# Altium PCB STM32_PCB.PcbDoc
Units mm, origin at the board's own origin, x right, y up, seen from the top; angles counter-clockwise.
Board outline 36.25 x 35.25 mm, 4 copper layers (Top Layer, Int1 (GND), Int2 (PWR), Bottom Layer), stack 1.518 mm thick; 35 components, 27 nets, 166 pads, 38 vias.
Unrouted connection lines stored in the file: 21.
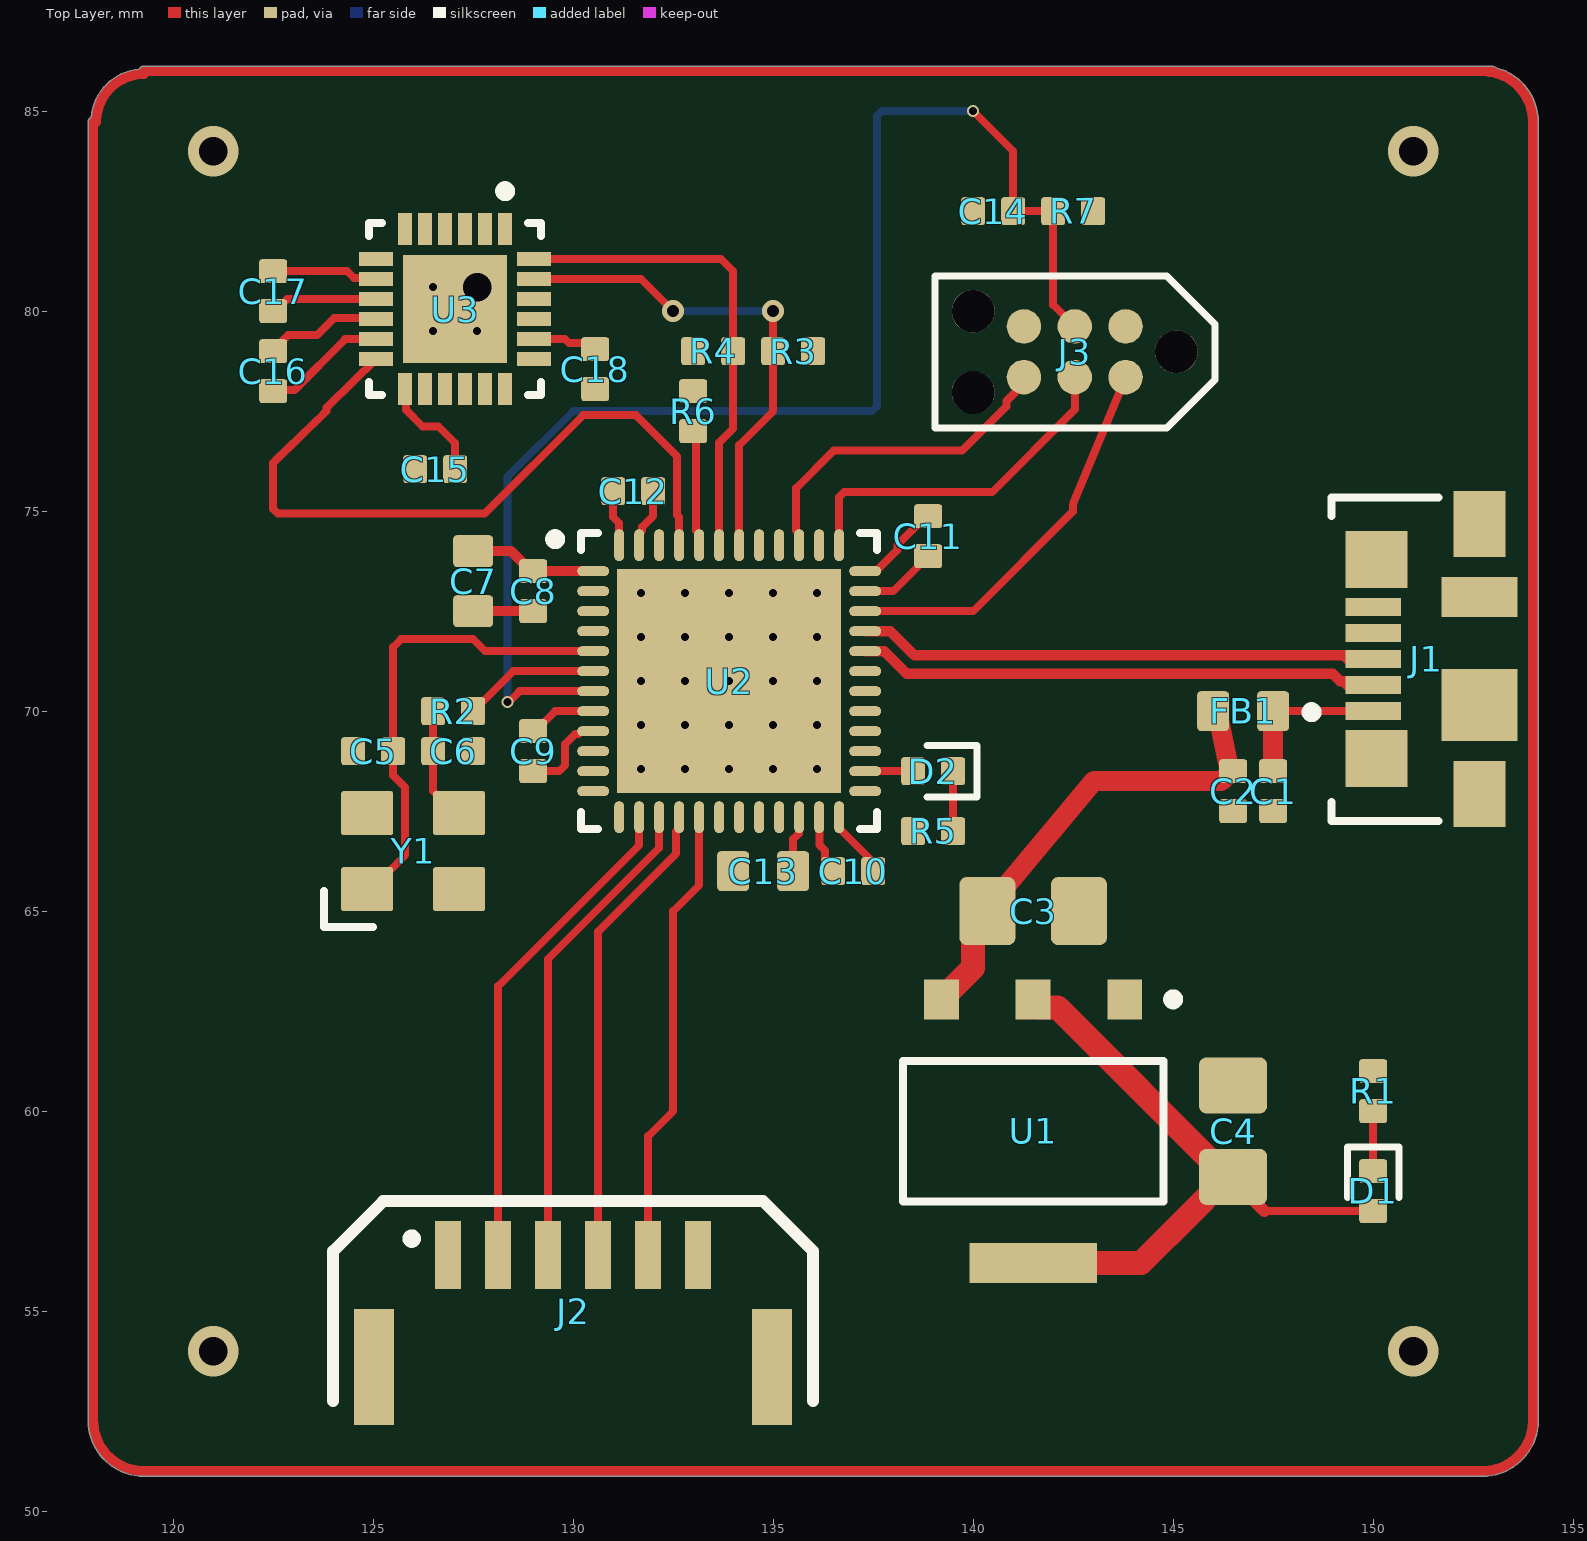
[diagram p0: Top Layer view]
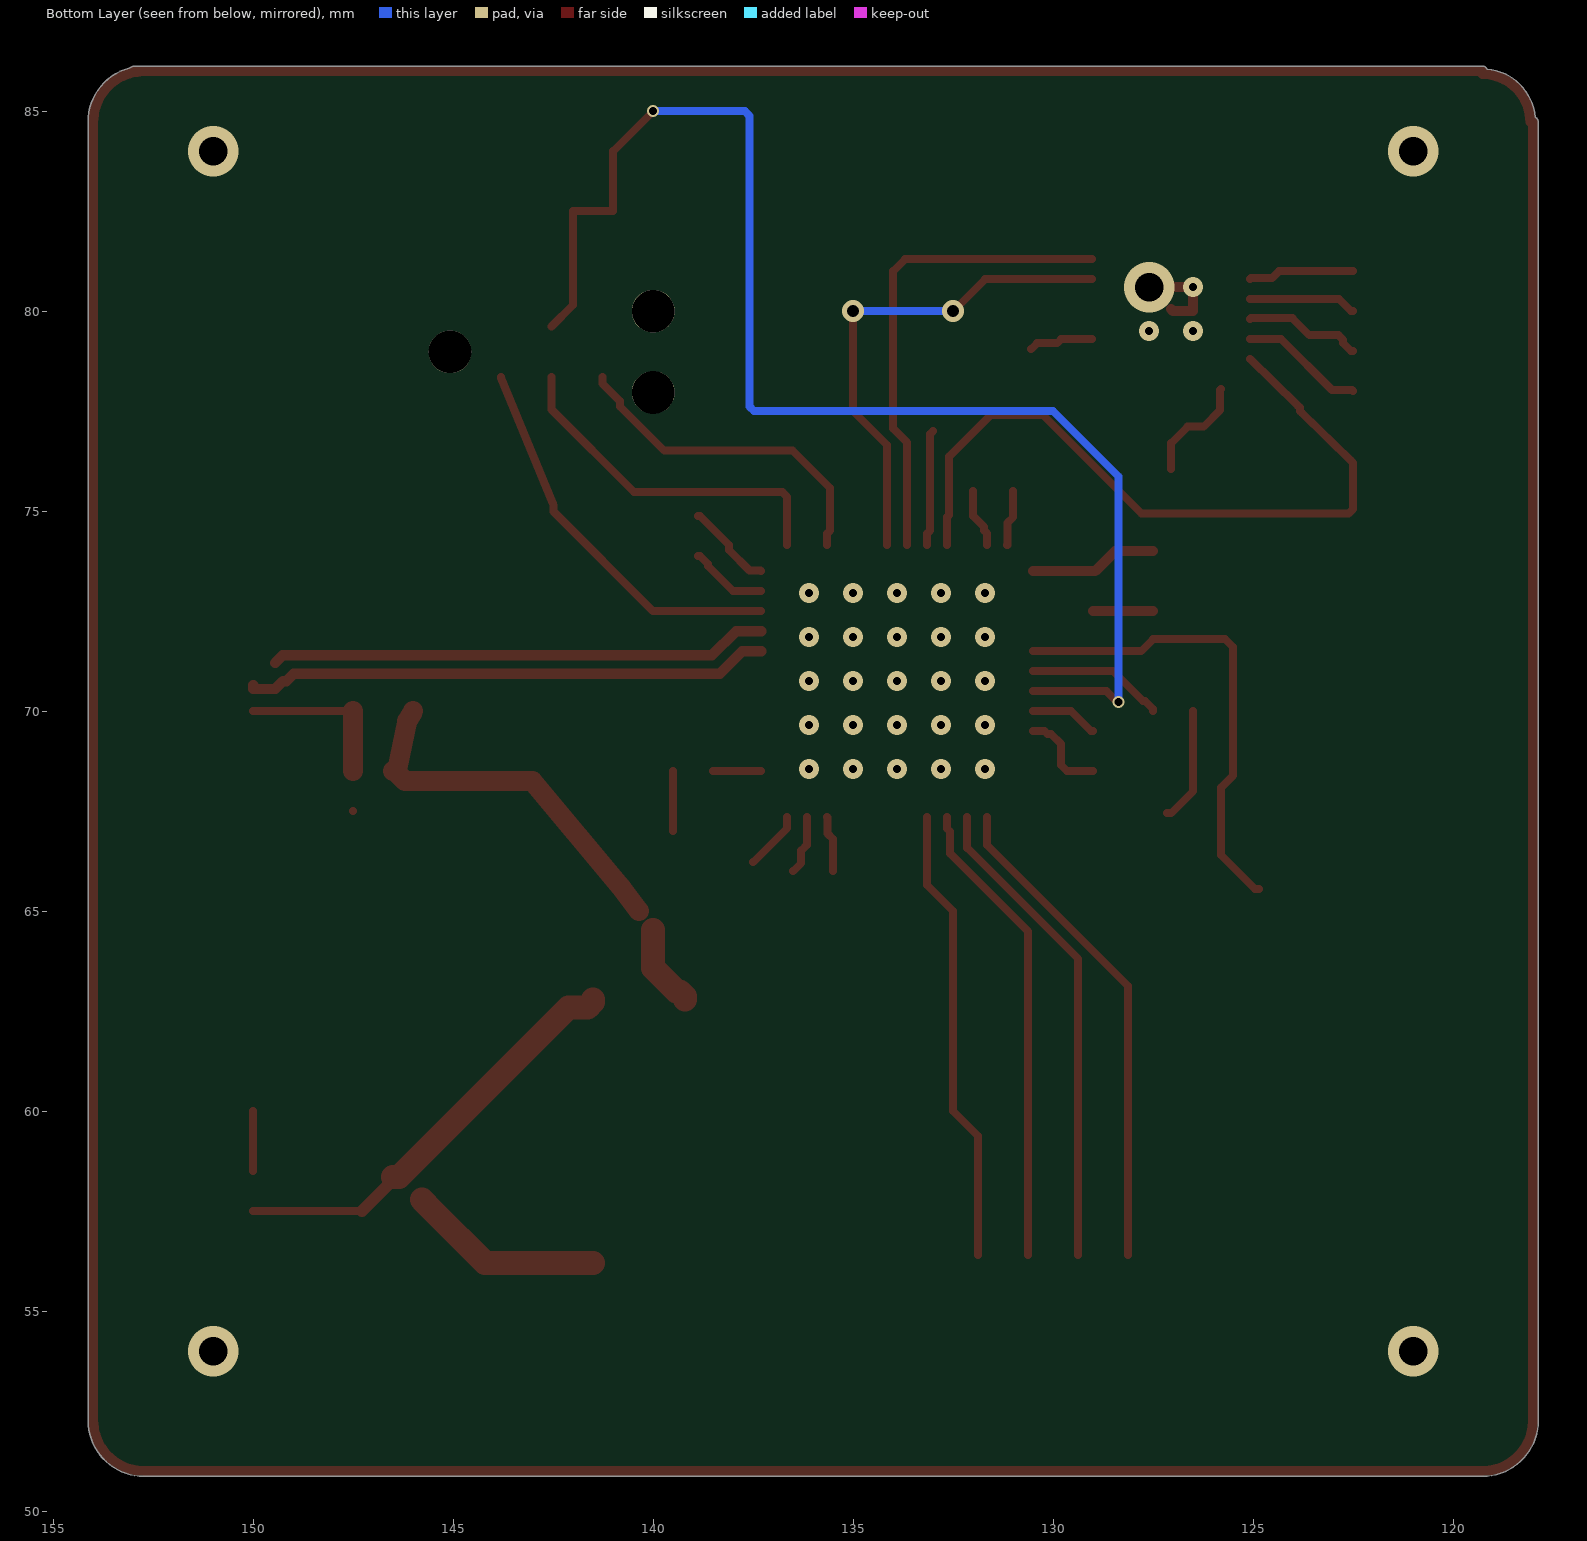
[diagram p1: Bottom Layer view, seen from below]
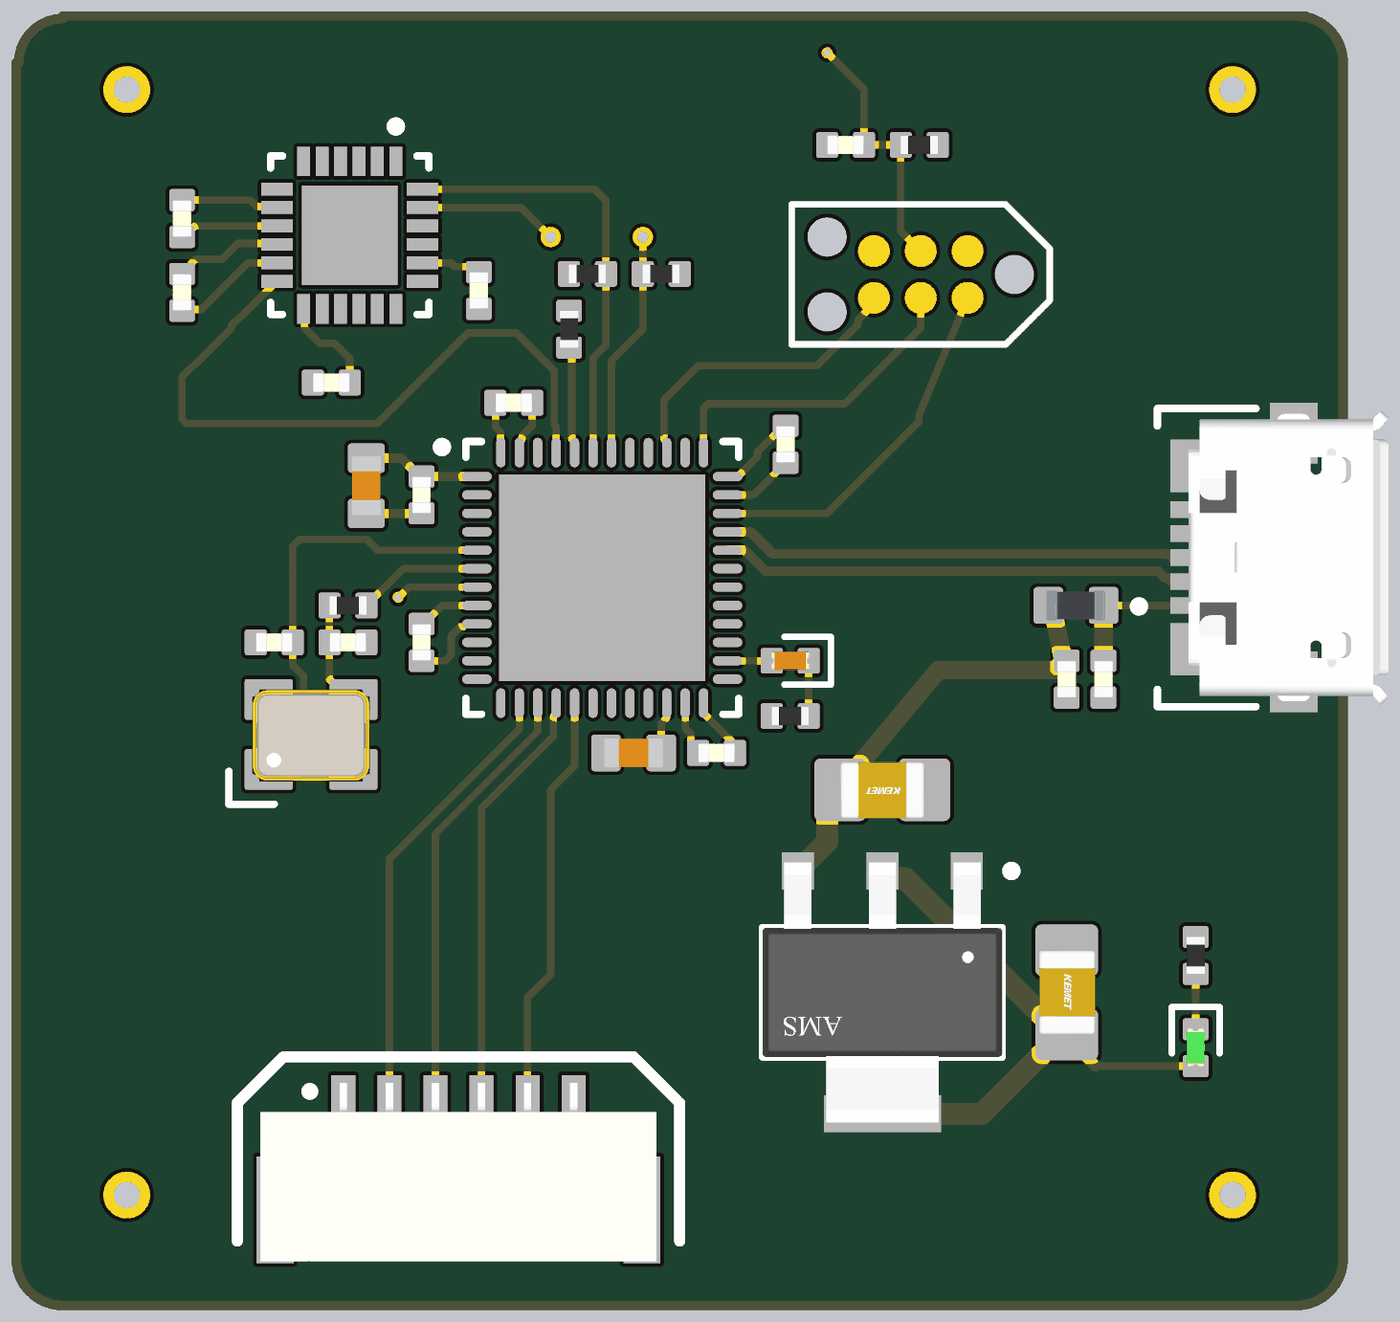
[diagram p2: 3D render of the assembled board from above, using the file's embedded part models]

## Layer stack, top to bottom
Top Solder: solder mask 0.0254, SM-001, Dk 4
Top Layer: signal copper 0.009
Dielectric 1: prepreg 0.2, PP-017, Dk 4.6
Int1 (GND): signal copper 0.0175
Dielectric 3: core 1.065, Core-039, Dk 4.6
Int2 (PWR): signal copper 0.0175
Dielectric 5: prepreg 0.2, PP-017, Dk 4.6
Bottom Layer: signal copper 0.009
Bottom Solder: solder mask 0.0254, SM-001, Dk 4

## Board outline
117.873,52.27 117.873,84.73 cw(c118,84.73) 117.948,84.846 cw(c119.27,84.73) 119.154,86.052 cw(c119.27,86) 119.27,86.127 153,86.127 153.101,86.077 cw(c152.73,84.73) 154.127,84.73 154.127,52.27 cw(c152.73,52.27) 152.73,50.873 119.27,50.873 cw(c119.27,52.27)

## Design rules (kind name [scope] priority, off if disabled: settings)
Clearance [All] p1: gap=0.2 ignorepadtopadclearanceinfootprint=FALSE
DiffPairsRouting [All] p1: maxlimit=0.203 minlimit=0.203 mostfreqgap=0.203 toplayer_minwidth=0.26 toplayer_maxwidth=0.26 toplayer_prefwidth=0.26 midlayer1_minwidth=0.26 midlayer1_maxwidth=0.26 midlayer1_prefwidth=0.26 midlayer2_minwidth=0.26 midlayer2_maxwidth=0.26 midlayer2_prefwidth=0.26 bottomlayer_minwidth=0.26 bottomlayer_maxwidth=0.26 bottomlayer_prefwidth=0.26 maxuncoupledlength=12.7
PolygonConnect [All] p1: connectstyle=Direct reliefconductorwidth=0.254 reliefentries=4 polygonreliefangle="90 Angle" airgapwidth=0.254
RoutingVias [All] p1: holewidth=0.3 width=0.7 viastyle="Through Hole" minholewidth=0.25 minwidth=0.55 maxholewidth=0.4 maxwidth=0.9
SolderMaskExpansion [All] p1: expansion=0.102 istentingtop=FALSE
SupplyNets "Schematic Supply Nets_4" [InNet('GND')] p1: voltage=0.000
SupplyNets "Schematic Supply Nets_3" [InNet('3V3')] p2: voltage=0.000
SupplyNets "Schematic Supply Nets_2" [InNet('VBUS')] p3: voltage=0.000
SupplyNets "Schematic Supply Nets_1" [InNet('+5V')] p4: voltage=0.000
UnRoutedNet [All] p1: checkbadconnections=TRUE
Width [All] p1: maxlimit=1 minlimit=0.2 preferedwidth=0.254 midlayer1_minwidth=0.254 midlayer1_maxwidth=0.254 midlayer2_minwidth=0.254 midlayer2_maxwidth=0.254 minimp=50.000000 maximp=50.000000 favimp=50.000000
28 further rules are at their usual default settings.

## Classes and differential pairs
differential pair class *DIFF_USB: USB_D
differential pair USB_D: +USB_D_P -USB_D_N

## Components (designator, comment, footprint, x,y, rotation, side; value= is the part's Value field where it differs from the comment)
C1 "2u2" CAP_0402 147.5,68 r270 top
C2 "2u2" CAP_0402 146.5,68 r270 top
C3 "22u" CAP_0805 141.5,65 r180 top
C4 "22u" CAP_0805 146.5,59.5 r270 top
C5 "C0402" CAP_0402 125,69 r180 top
C6 "C0402" CAP_0402 127,69 r0 top
C7 "2.2u" CAP_0603 127.5,73.25 r270 top
C8 "100n" CAP_0402 129,73 r270 top
C9 "100n" CAP_0402 129,69 r90 top
C10 "100n" CAP_0402 137,66 r180 top
C11 "100n" CAP_0402 138.875,74.375 r270 top
C12 "100n" CAP_0402 131.5,75.5 r0 top
C13 "2u2" CAP_0603 134.75,66 r180 top
C14 "100n" CAP_0402 140.5,82.5 r180 top
C15 "100n" CAP_0402 126.55,76.05 r180 top
C16 "100n" CAP_0402 122.5,78.5 r270 top
C17 "10n" CAP_0402 122.5,80.5 r270 top
C18 "2n2" CAP_0402 130.55,78.55 r270 top
D1 "GREEN" LED_0402_GREEN 150,58 r90 top
D2 "RED" LED_0402_RED 139,68.5 r0 top
FB1 "120R" FB_0603 146.75,70 r180 top
J1 "473460001" FP-473460001-MFG 152.31,71.3 r90 top
J2 "SM06B-GHS-TB" SM06B-GHS-TB 130,55 r0 top
J3 "TC2030-NL" TC2030-NL-FP 142.54,78.984 r180 top
R1 "1K" RES_0402 150,60.5 r270 top
R2 "0R" RES_0402 127,70 r180 top
R3 "2k2" RES_0402 135.5,79 r0 top
R4 "2k2" RES_0402 133.5,79 r180 top
R5 "1K" RES_0402 139,67 r0 top
R6 "10k" RES_0402 133,77.5 r90 top
R7 "10k" RES_0402 142.5,82.5 r180 top
U1 "AMS1117-3.3" FP-AMS1117-IPC_C 141.5,59.5 r270 top
U2 "STM32F411CEU6" STM-UFQFPN48_L 133.9,70.75 r0 top
U3 "MPU-6050" IS-QFN-24_V 127.05,80.05 r270 top
Y1 "24MHz" XTAL_3225 126,66.5 r0 top

## Footprints (in the part's own frame and the unit in brackets; to place one, negate y for a bottom-side part, rotate by r counter-clockwise, add the part's x,y. Pads: shape width x height; smd on the part's side, far side on the other; paste and mask are expansions set on the pad)
CAP_0402 [mm]
  rrect25% 0.6x0.7 smd: 1(-0.5,0) 2(0.5,0)
  body extent -0.5,-0.26 0.5,0.26, height 0.37
CAP_0603 [mm]
  rrect25% 0.8x1 smd: 1(-0.75,0) 2(0.75,0)
  body extent -0.8,-0.4 0.8,0.4, height 0.51
CAP_0805 [mm]
  rrect25% 1.4x1.7 smd: 1(-1.143,0) 2(1.143,0)
  body extent -1.15,-0.76 1.15,0.79, height 1.01
FB_0603 [mm]
  rrect25% 0.8x1 smd: 1(-0.75,0) 2(0.75,0)
  body extent -0.8,-0.4 0.8,0.4, height 0.81
FP-473460001-MFG [mm]
  rect 0.45x1.38 smd paste+0 mask+0: 1(-1.3,2.31) 2(-0.65,2.31) 3(0,2.31) 4(0.65,2.31) 5(1.3,2.31)
  rect 1.425x1.55 smd paste+0 mask+0: 6(-2.488,2.225) 7(2.487,2.225)
  rect 1.65x1.3 smd paste+0 mask+0: 8(-3.375,-0.35) 11(3.375,-0.35)
  rect 1.8x1.9 smd paste+0 mask+0: 9(-1.15,-0.35)
  rect 1x1.9 smd paste+0 mask+0: 10(1.55,-0.35)
  silkscreen extent -4.04,0.67 4.05,3.97, body extent -4.3,-2.48 4.3,3.45, height 0.25
FP-AMS1117-IPC_C [mm]
  rect 1.004x0.872 smd paste+0 mask+0: 1(-3.295,2.29) 2(-3.295,0) 3(-3.295,-2.29)
  rect 1.004x3.182 smd paste+0 mask+0: 4(3.295,0)
  silkscreen extent -3.42,-3.25 1.75,3.63, body extent -3.9,-3.35 3.9,3.35, height 0.25
IS-QFN-24_V [mm] "QFN, 24-Leads, Body 4x4mm, Pitch 0.5mm, Thermal Pad 2.7x2.6mm"
  rect 0.8x0.35 smd: 1(-2,1.25) 2(-2,0.75) 3(-2,0.25) 4(-2,-0.25) 5(-2,-0.75) 6(-2,-1.25) 13(2,-1.25) 14(2,-0.75) 15(2,-0.25) 16(2,0.25) 17(2,0.75) 18(2,1.25)
  rect 0.35x0.85 smd mask+0.102: 7(-1.25,-1.975) 8(-0.75,-1.975) 9(-0.25,-1.975) 10(0.25,-1.975) 11(0.75,-1.975) 12(1.25,-1.975) 19(1.25,1.975) 20(0.75,1.975) 21(0.25,1.975) 22(-0.25,1.975) 23(-0.75,1.975) 24(-1.25,1.975)
  rect 2.7x2.6 smd: 25(0,0)
  silkscreen extent -3.07,-2.15 2.15,2.15, body extent -2,-2 2,2, height 0.95
LED_0402_GREEN [mm]
  rrect25% 0.6x0.7 smd: A(-0.5,0) K(0.5,0)
  silkscreen extent -0.15,-0.65 1.1,0.65, body extent -0.51,-0.25 0.51,0.25, height 0.45
LED_0402_RED [mm]
  rrect25% 0.6x0.7 smd: A(-0.5,0) K(0.5,0)
  silkscreen extent -0.15,-0.65 1.1,0.65, body extent -0.51,-0.25 0.51,0.25, height 0.45
RES_0402 [mm]
  rrect25% 0.6x0.7 smd: 1(-0.5,0) 2(0.5,0)
  body extent -0.5,-0.25 0.5,0.25, height 0.3
SM06B-GHS-TB [mm]
  rect 0.65x1.7 smd: 1(-3.125,1.4) 2(-1.875,1.4) 3(-0.625,1.4) 4(0.625,1.4) 5(1.875,1.4) 6(3.125,1.4)
  rect 1x2.9 smd: ""(-4.975,-1.4) ""(4.975,-1.4)
  silkscreen extent -6,-2.25 6,2.75, body extent -5.38,-2.8 5.38,2.05, height 4.26
STM-UFQFPN48_L [mm] "QFN, 48-Leads, Body 7.1x7.1mm, Pitch 0.5mm, Thermal Pad 5.6x5.6mm, IPC High Density"
  oval 0.8x0.25 smd: 1(-3.4,2.75) 2(-3.4,2.25) 3(-3.4,1.75) 4(-3.4,1.25) 5(-3.4,0.75) 6(-3.4,0.25) 7(-3.4,-0.25) 8(-3.4,-0.75) 9(-3.4,-1.25) 10(-3.4,-1.75) 11(-3.4,-2.25) 12(-3.4,-2.75) 25(3.4,-2.75) 26(3.4,-2.25) 27(3.4,-1.75) 28(3.4,-1.25) 29(3.4,-0.75) 30(3.4,-0.25) 31(3.4,0.25) 32(3.4,0.75) 33(3.4,1.25) 34(3.4,1.75) 35(3.4,2.25) 36(3.4,2.75)
  oval 0.25x0.8 smd: 13(-2.75,-3.4) 14(-2.25,-3.4) 15(-1.75,-3.4) 16(-1.25,-3.4) 17(-0.75,-3.4) 18(-0.25,-3.4) 19(0.25,-3.4) 20(0.75,-3.4) 21(1.25,-3.4) 22(1.75,-3.4) 23(2.25,-3.4) 24(2.75,-3.4) 37(2.75,3.4) 38(2.25,3.4) 39(1.75,3.4) 40(1.25,3.4) 41(0.75,3.4) 42(0.25,3.4) 43(-0.25,3.4) 44(-0.75,3.4) 45(-1.25,3.4) 46(-1.75,3.4) 47(-2.25,3.4) 48(-2.75,3.4)
  rect 5.6x5.6 smd: 49(0,0)
  silkscreen extent -4.47,-3.7 3.7,3.7, body extent -3.55,-3.55 3.55,3.55, height 0.6
TC2030-NL-FP [mil]
  round 33.98 smd paste-16.99: 1(-50,-25) 2(-50,25) 3(0,-25) 4(0,25) 5(50,-25) 6(50,25)
  round 42.01 hole 42.01 unplated: MH(-100,0) MH(100,-40) MH(100,40)
  silkscreen extent -138,-75 138,75
XTAL_3225 [mm]
  rrect10% 1.3x1.1 smd: 1(-1.15,-0.95) 2(1.15,-0.95) 3(1.15,0.95) 4(-1.15,0.95)
  silkscreen extent -2.23,-1.89 -1,-1, body extent -1.6,-1.28 1.6,1.22, height 0.61

## Part data
C1 C2 C5 C6 C8 C9 C10 C11 C12 C14 C15 C16 C17 C18: library part CAP_0402, "Capacitor SMD 0402"
C3 C4: library part CAP_0805, "Capacitor SMD 0805"
C7 C13: library part CAP_0603, "Capacitor SMD 0603"
D1: library part LED_0402_GREEN, "LED 0402 GREEN SMD"
D2: library part LED_0402_RED, "LED 0402 RED SMD"
FB1: library part FB_0603, "Ferrite Bead SMD 0603"
J1: library part CMP-2000-05246-2, "CONN RCPT USB2.0 MICRO B SMD R/A", Current Rating=1.8A, Manufacturer=Molex, Package=0, Temperature="-30°C to +85°C", Temperature Range High=+85°C, Temperature Range Low=-30°C, Voltage Rating=30V, Automotive=No, Category=Conn, ComponentLink2Description=Datasheet, ComponentLink2URL=https://www.molex.com/webdocs/datasheets/pdf/en-us/0473460001_IO_CONNECTORS.pdf, Conn Orientation="Right Angle", Contact Material=Gold,Nickel, Device Class L1=Connectors, Device Class L2="USB Connectors", Device Class L3=unset, Digikey Description="CONN RCPT USB2.0 MICRO B SMD R/A", Footprint Url=https://www.molex.com/pdm_docs/sd/473460001_sd.pdf, Height=2.945mm, Is Female=yes, Lead Free=Yes, Manufacturer Part Number=473460001, Number Of Contacts=5, Octopart=https://octopart.com/47346-0001-molex-7164928, Pitch=0.65mm, RoHS=TRUE, Shielding=true, Usb Standard="USB 2.0"
J2: "Header Connector 6 Position 1.25MM Pitch SMD Horizontal JST GH", Manufacturer=JST, Manufacturer Part Number=SM06B-GHS-TB
J3: "Tag-Connect No-Solder SWD Debug Connector (No Legs) DO NOT PLACE", Manufacturer=Tag-Connect, Manufacturer Part Number=TC2030-NL-FP
R1 R2 R3 R4 R5 R6 R7: library part RES_0402, "Resistor SMD 0402"
U1: library part CMP-209535-000001-1, "LDO Voltage Regulators 1A, 3.3V", Dropout Voltage=1.1V, Manufacturer="Advanced Monolithic Systems", Max Junction Temp=+125°C, Max Power Dissipation=1.2W, Max Supply Voltage=15V, Nominal Supply Current=5mA, Output Current=1A, Output Voltage=3.3V, Package=AMS1117, Temperature="-40°C to +125°C", Temperature Range Low=-40°C, Automotive=No, Category=IC, ComponentLink2Description=Datasheet, ComponentLink2URL=http://www.advanced-monolithic.com/pdf/ds1117.pdf, Device Class L1="Integrated Circuits (ICs)", Device Class L2="Power Management ICs", Device Class L3="Voltage Regulators - Linear", Height=1.8mm, Ipc Land Pattern Name=SOT229P700X180-4, Lead Free=Yes, Manufacturer Part Number=AMS1117-3.3, Number Of Outputs=1, Octopart=https://octopart.com/ams1117-3.3-advanced+monolithic+systems-25899300, Output Type=Fixed, RoHS=TRUE, Standoff Height=0.64mm, Temperature Range High=+125°C
U2: library part CMP-0243-00165-1, "ARM Cortex-M4 32-bit MCU+FPU, 512 KB Flash, 128 KB RAM, 36 I/Os, 48-Pin UFQFPN, -40 to 85 degC, Tray", I/Os (High Current)=36, Operating Frequency(F) (Processor speed) (MHz)=100, Package Description=UFQFPN48, Package Reference="48-Pin Ultra Thin Fine Pitch Quad Flat No-Lead, 7 x 7 x 0.6 mm Body, 0.5 mm Pitch, Exposed Pad", Supply Voltage(Vcc) min (V)=1.7, ComponentLink1Description="Manufacturer URL", ComponentLink1URL=http://www.st.com/, ComponentLink2Description=Datasheet, ComponentLink2URL=http://www.st.com/st-web-ui/static/active/en/resource/technical/document/datasheet/DM00115249.pdf, Core="ARM Cortex-M4", DatasheetVersion="Rev. 6", FLASH Size (Prog) (kB)=512, Internal RAM Size (kB)=128, Mounting Technology="Surface Mount", Packing=Tray
U3: library part CMP-1753-00002-2, "3-Axis Gyroscope, Accelerometer and a Digital Motion Processor(TM) (DMP), 2.375 to 3.46 V, -40 to 85 degC, 24-Pin QFN, RoHS, Tape and Reel", Manufacturer=InvenSense, Standard Package=5,000, Category=Sensors,Transducers, Datasheet URL=http://datasheet.octopart.com/MPU-6050-InvenSense-datasheet-14421344.pdf, Datasheet Version="Rev. 3.3, 05/2012", Dynamic Catalog=MPU-6000™Series, Family=Multifunction, Featured Product=MPU-60506-Axis,IntegratedI²CSolution, Manufacturer URL=http://www.invensense.com/, Online Catalog=MPU-6000™Series, Other Names="1428-1007-2 / MPU6050", Output Type=Digital, Sensor Type=MotionTracking, Unit PriceUSD=Digital
Y1: library part TSX-3225_24.0000MF15X-AC, "Crystal SMD 24MHz 10PPM 7pF 3225", Manufacturer=Epson, Manufacturer Part Number="TSX-3225 24.0000MF15X-AC"

## Via types
v1: diameter 0.5, hole 0.2, Top Layer to Bottom Layer, 29 vias
v2: diameter 1.27, hole 0.711, Top Layer to Bottom Layer, 5 vias
v3: diameter 0.3, hole 0.2, Top Layer to Bottom Layer, 2 vias
v4: diameter 0.55, hole 0.3, Top Layer to Bottom Layer, 2 vias

## Nets (pads, with @x,y where several pads share a name; then routed paths per layer and width w, separated by ;. In a path a pad name is that pad's centre, name@x,y a point inside that pad or via, vN(x,y) a via of type N, cw(c..) or ccw(c..) an arc to the next point about the centre after c; other vN are vias at no path point)
3V3: C4.2 C7.1 C8.1 C9.1 C10.1 C11.1 C12.1 C15.1 C17.1 D1.A J2.1 J3.1 R3.2 R4.2 R7.1 U1.2 U1.4 U2.1 U2.9 U2.24 U2.36 U2.48 U3.8 U3.13 | length 32.1
  Top Layer w0.2: C17.1 124.351,81 124.526,80.825 125.05,80.825 U3.8 ; U3.13 125.825,78.025 125.825,77.526 126.238,77.113 126.637,77.113 127.05,76.7 C15.1 ; C9.1 129.65,68.5 129.8,68.65 129.8,69.176 130.049,69.425 130.137,69.425 130.211,69.5 U2.9 ; C12.1 131,74.85 131.14,74.71 131.14,74.16 U2.48 ; U2.24 136.65,67.075 C10.1@137.5,66.225 ; U2.36 137.316,73.516 137.591,73.516 138.108,74.033 138.108,74.158 138.825,74.875 C11.1 ; 145.485,57.5 145.772,57.787 C4.2@145.78,57.787 ; 147.282,57.5 D1.A
  Top Layer w0.254: C7.1 128.45,74 128.95,73.5 C8.1 U2.1
  Top Layer w0.3: C4.2@146.425,58.357 147.282,57.5
  Top Layer w0.6: U1.4 144.198,56.205 145.489,57.496 C4.2@145.78,57.787 ; U1.2 141.5,62.729 141.636,62.593 142.114,62.593 146.35,58.357 146.425,58.357 C4.2
+5V: C2.1 C3.2 FB1.2 U1.3 | length 11.5
  Top Layer w0.5: C3.2 140.807,65.6 143.02,68.25 146.2,68.25 146.45,68.5 C2.1 146.4,68.55 146.15,69.75 FB1.2
  Top Layer w0.6: U1.3 139.21,62.861 139.346,62.997 139.412,62.997 140,63.585 C3.2@140,64.534
GND: C1.2 C2.2 C3.1 C4.1 C5.2 C6.2 C7.2 C8.2 C9.2 C10.2 C11.2 C12.2 C13.2 C14.2 C15.2 C16.2 C17.2 C18.2 J1.5 J2.6 J3.5 R1.1 R5.1 R6.2 U1.1 U2.8 U2.23 U2.35 U2.47 U2.49 U3.1 U3.9 U3.11 U3.18 U3.25 Y1.2 Y1.4 | length 16.2
  Top Layer w0.2: C16.2 122.533,78.033 123.033,78.033 124.3,79.3 U3.11 ; C17.2 122.55,80 122.85,80.3 U3.9 ; C9.2 129.05,69.5 129.55,70 U2.8 ; U2.47 131.65,74.439 131.725,74.514 131.725,74.601 132,74.876 C12.2 ; U2.23 136.16,67.34 136.16,66.652 136.3,66.511 136.3,66.2 C10.2 ; U2.35 138,73 138.625,73.625 138.625,73.675 138.825,73.875 C11.2
  Top Layer w0.254: U3.25 127,80 126.5,80 126.5,80.439 126.58,80.52 126.661,80.6 v2(127.6,80.6) ; C7.2 C8.2
  other v1: 131.7,68.55 132.8,68.55 133.9,68.55 135,68.55 136.1,68.55 131.7,69.65 132.8,69.65 133.9,69.65 135,69.65 136.1,69.65 131.7,70.75 132.8,70.75 133.9,70.75 135,70.75 136.1,70.75 131.7,71.85 132.8,71.85 133.9,71.85 135,71.85 136.1,71.85 131.7,72.95 132.8,72.95 133.9,72.95 135,72.95 136.1,72.95 126.5,79.5 127.6,79.5 126.5,80.6 127.6,80.6
IMU_CPOUT: C18.1 U3.20 | length 1.6
  Top Layer w0.2: U3.20 129.8,79.3 129.9,79.2 130.4,79.2 C18.1
IMU_INT: U2.45 U3.12 | length 18.7
  Top Layer w0.2: 123.894,77.647 U3.12 ; U2.45 132.65,74.85 132.598,74.902 132.598,75.068 132.6,75.07 132.6,76.37 131.57,77.4 130.25,77.4 127.787,74.937 122.617,74.937 122.5,75.054 122.5,76.12 122.5,76.203 122.56,76.263 123.775,77.449 123.833,77.507 123.834,77.587 123.892,77.645 ; 123.893,77.646 ccw(c124.033,77.503) 123.892,77.645
IMU_REGOUT: C16.1 U3.10 | length 3
  Top Layer w0.2: C16.1 122.55,79 122.75,79.2 122.75,79.283 122.867,79.4 123.596,79.4 124.021,79.825 125.05,79.825 U3.10
IMU_SCL: R3.1 U2.42 U3.23 | length 12.5
  Top Layer w0.2: U3.23 131.7,80.8 v4(132.5,80) ; U2.42 134.15,76.65 135,77.5 R3.1 v4(135,80)
  Bottom Layer w0.2: v4(132.5,80) v4(135,80)
IMU_SDA: R4.1 U2.43 U3.24 | length 12.1
  Top Layer w0.2: U3.24 133.7,81.3 134,81 R4.1 134,77.066 133.65,76.716 U2.43
LED_PWR_K: D1.K R1.2 | length 1.5
  Top Layer w0.2: D1.K R1.2
MCU_BOOT0: R6.1 U2.44 | length 2.9
  Top Layer w0.2: R6.1 133.075,76.925 133.075,74.514 133.15,74.439 U2.44
mcu_led_A: D2.A U2.26 | length 1.2
  Top Layer w0.2: U2.26 D2.A
mcu_led_K: D2.K R5.2 | length 1.5
  Top Layer w0.2: R5.2 D2.K
MCU_NRST: C14.1 J3.3 R7.2 U2.7 | length 34.6
  Top Layer w0.2: v3(128.361,70.225) 128.388,70.225 128.663,70.5 U2.7 ; v3(140,85) 141,84 C14.1 R7.2 142,80.159 J3.3
  Bottom Layer w0.2: v3(128.361,70.225) 128.361,75.861 130,77.5 137.474,77.5 137.591,77.617 137.591,84.883 137.708,85 v3(140,85)
MCU_OSC_IN: C5.1 U2.5 Y1.1 | length 11.8
  Top Layer w0.2: Y1.1 124.95,65.55 125.8,66.4 125.8,68.092 125.5,68.392 C5.1 125.5,71.6 125.7,71.8 127.5,71.8 127.8,71.5 U2.5
MCU_OSC_OUT: R2.1 U2.6 | length 3.4
  Top Layer w0.2: R2.1 127.5,70.05 127.7,70.25 127.75,70.25 128.5,71 U2.6
MCU_PA4: J2.2 U2.14 | length 12.4
  Top Layer w0.2: J2.2 128.125,63.125 131.65,66.65 U2.14
MCU_PA5: J2.3 U2.15 | length 12.1
  Top Layer w0.2: J2.3 129.375,63.809 132.15,66.584 U2.15
MCU_PA6: J2.4 U2.16 | length 11.8
  Top Layer w0.2: J2.4 130.625,64.494 132.575,66.444 132.575,66.986 132.65,67.061 U2.16
MCU_PA7: J2.5 U2.17 | length 11.5
  Top Layer w0.2: J2.5 131.875,59.375 132.5,60 132.5,65 133.15,65.65 U2.17
MCU_SWCLK: J3.4 U2.37 | length 8.8
  Top Layer w0.2: U2.37 136.65,75.358 136.767,75.475 140.475,75.475 142.54,77.54 J3.4
MCU_SWDIO: J3.2 U2.34 | length 9.8
  Top Layer w0.2: U2.34 140.001,72.5 142.492,74.99 142.492,75.102 142.495,75.141 142.507,75.198 J3.2
MCU_SWO: J3.6 U2.39 | length 8.5
  Top Layer w0.2: U2.39 135.65,74.439 135.575,74.514 135.575,75.575 136.511,76.511 139.722,76.511 140.834,77.623 140.834,77.751 141.27,78.188 J3.6
MCU_VCAP1: C13.1 U2.22 | length 1.4
  Top Layer w0.2: C13.1 135.5,66.8 135.64,66.94 135.64,67.34 U2.22
USB_D_N: J1.2 U2.32 | length 13.2
  Top Layer w0.26: U2.32 137.772,71.5 138.34,70.932 148.986,70.932 149.173,70.745 149.255,70.745 149.445,70.555 150,70.555 J1.2
USB_D_P: J1.3 U2.33 | length 12.5
  Top Layer w0.26: U2.33 137.927,72 138.532,71.395 149.26,71.395 J1.3@149.45,71.205
VBUS: C1.1 FB1.1 J1.1 | length 4
  Top Layer w0.2: FB1.1 J1.1
  Top Layer w0.5: C1.1 FB1.1
XTAL_IN: C6.1 R2.2 Y1.3 | length 2.9
  Top Layer w0.2: R2.2 C6.1 126.5,68 127.05,67.45 Y1.3
pads on no net: J1.4 J1.6 J1.7 J1.8 J1.9 J1.10 J1.11 J2. J3.MH U2.2 U2.3 U2.4 U2.10 U2.11 U2.12 U2.13 U2.18 U2.19 U2.20 U2.21 U2.25 U2.27 U2.28 U2.29 U2.30 U2.31 U2.38 U2.40 U2.41 U2.46 U3.2 U3.3 U3.4 U3.5 U3.6 U3.7 U3.14 U3.15 U3.16 U3.17 U3.19 U3.21 U3.22
copper on no net: | length 140
  Top Layer w0.254: 118,84.73 118,76 118,52.27 ccw(c119.27,52.27) 119.27,51 152.73,51 ccw(c152.73,52.27) 154,52.27 154,82 154,84.73 ccw(c152.73,84.73) 152.73,86 ; 118.07,84.73 cw(c119.27,84.73) 119.27,85.93 ; 119.27,86 121,86 153,86
  other v2: 121,54 151,54 121,84 151,84

## Text inside footprints (layer, text, board x,y; h text height)
D1: Mechanical 13 "+" at 149.492,56.117 h0.5 r90
D2: Mechanical 13 "+" at 137.117,69.008 h0.5